# Altium PCB fmu-io.PcbDoc
Units mm, origin at the board's own origin, x right, y up, seen from the top; angles counter-clockwise.
Board outline 50 x 36 mm, 2 copper layers (Top Layer, Bottom Layer); 24 components, 24 nets, 120 pads, 161 vias.
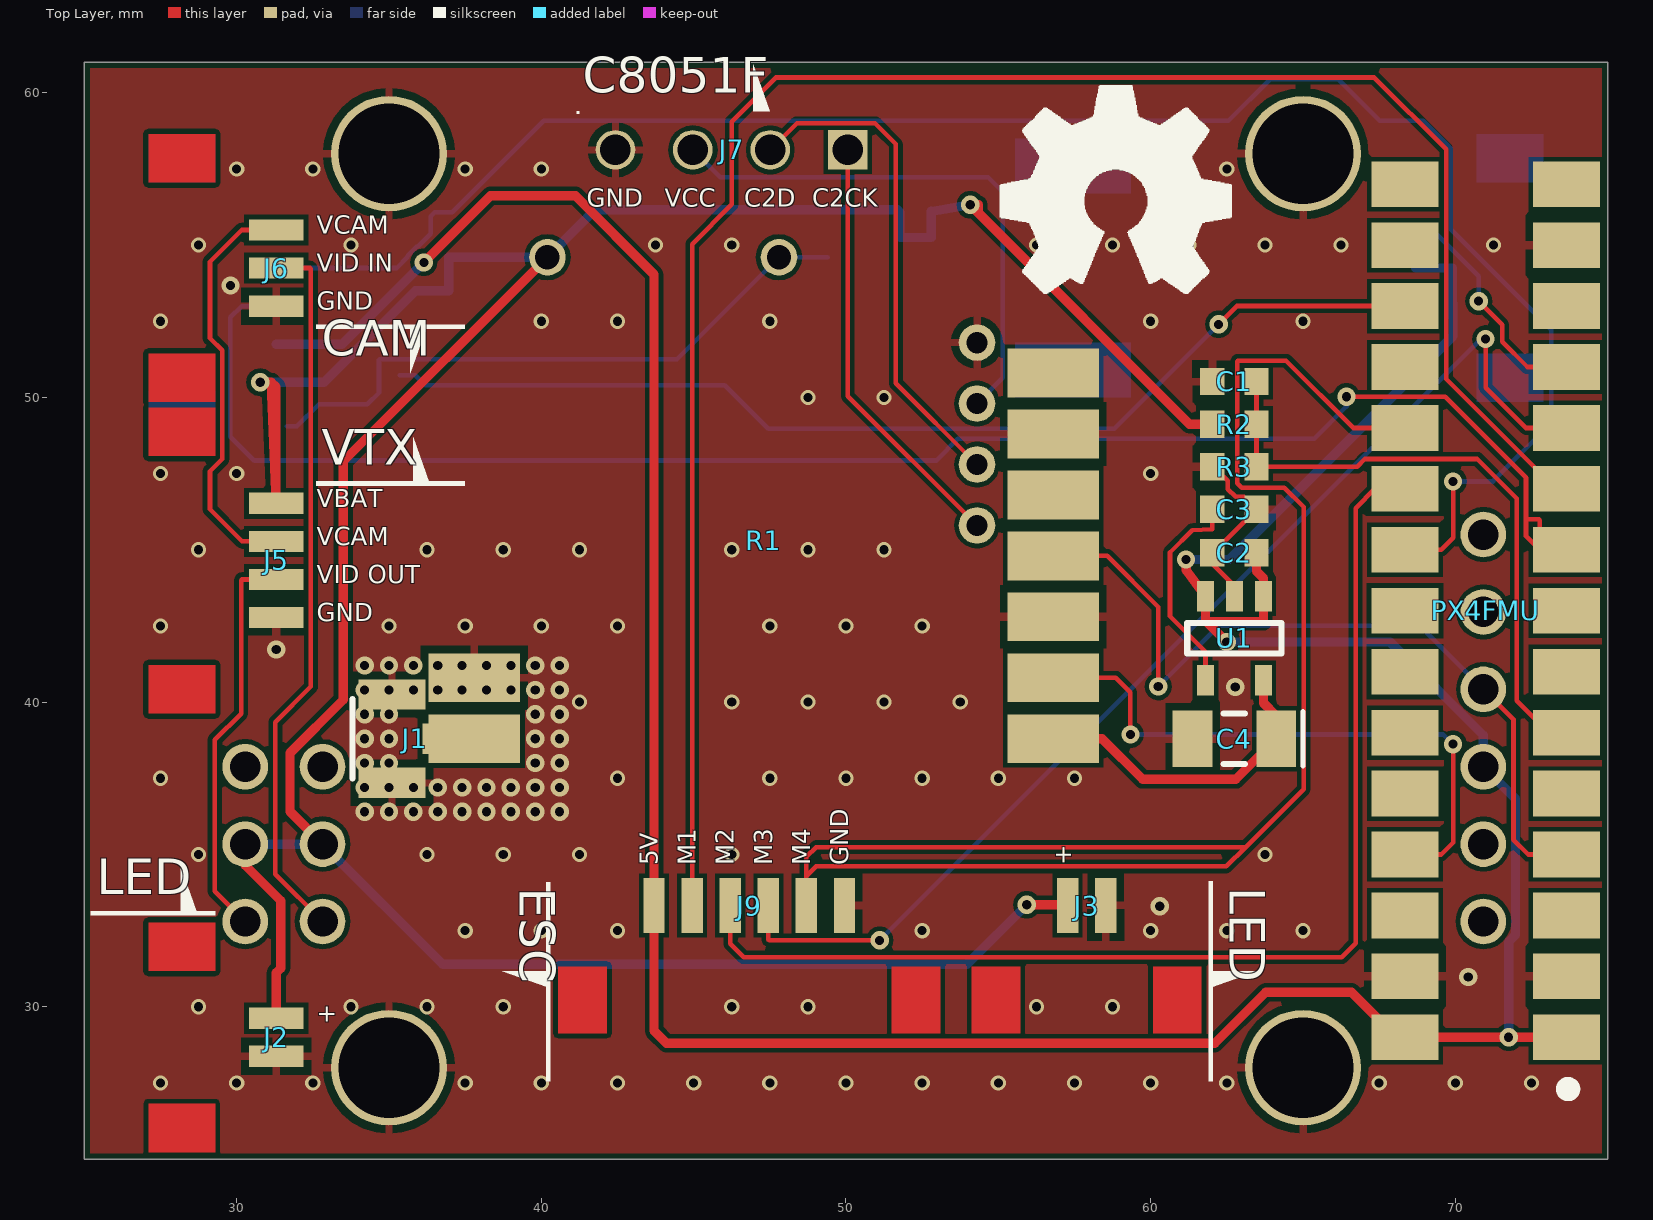
[diagram p0: Top Layer view]
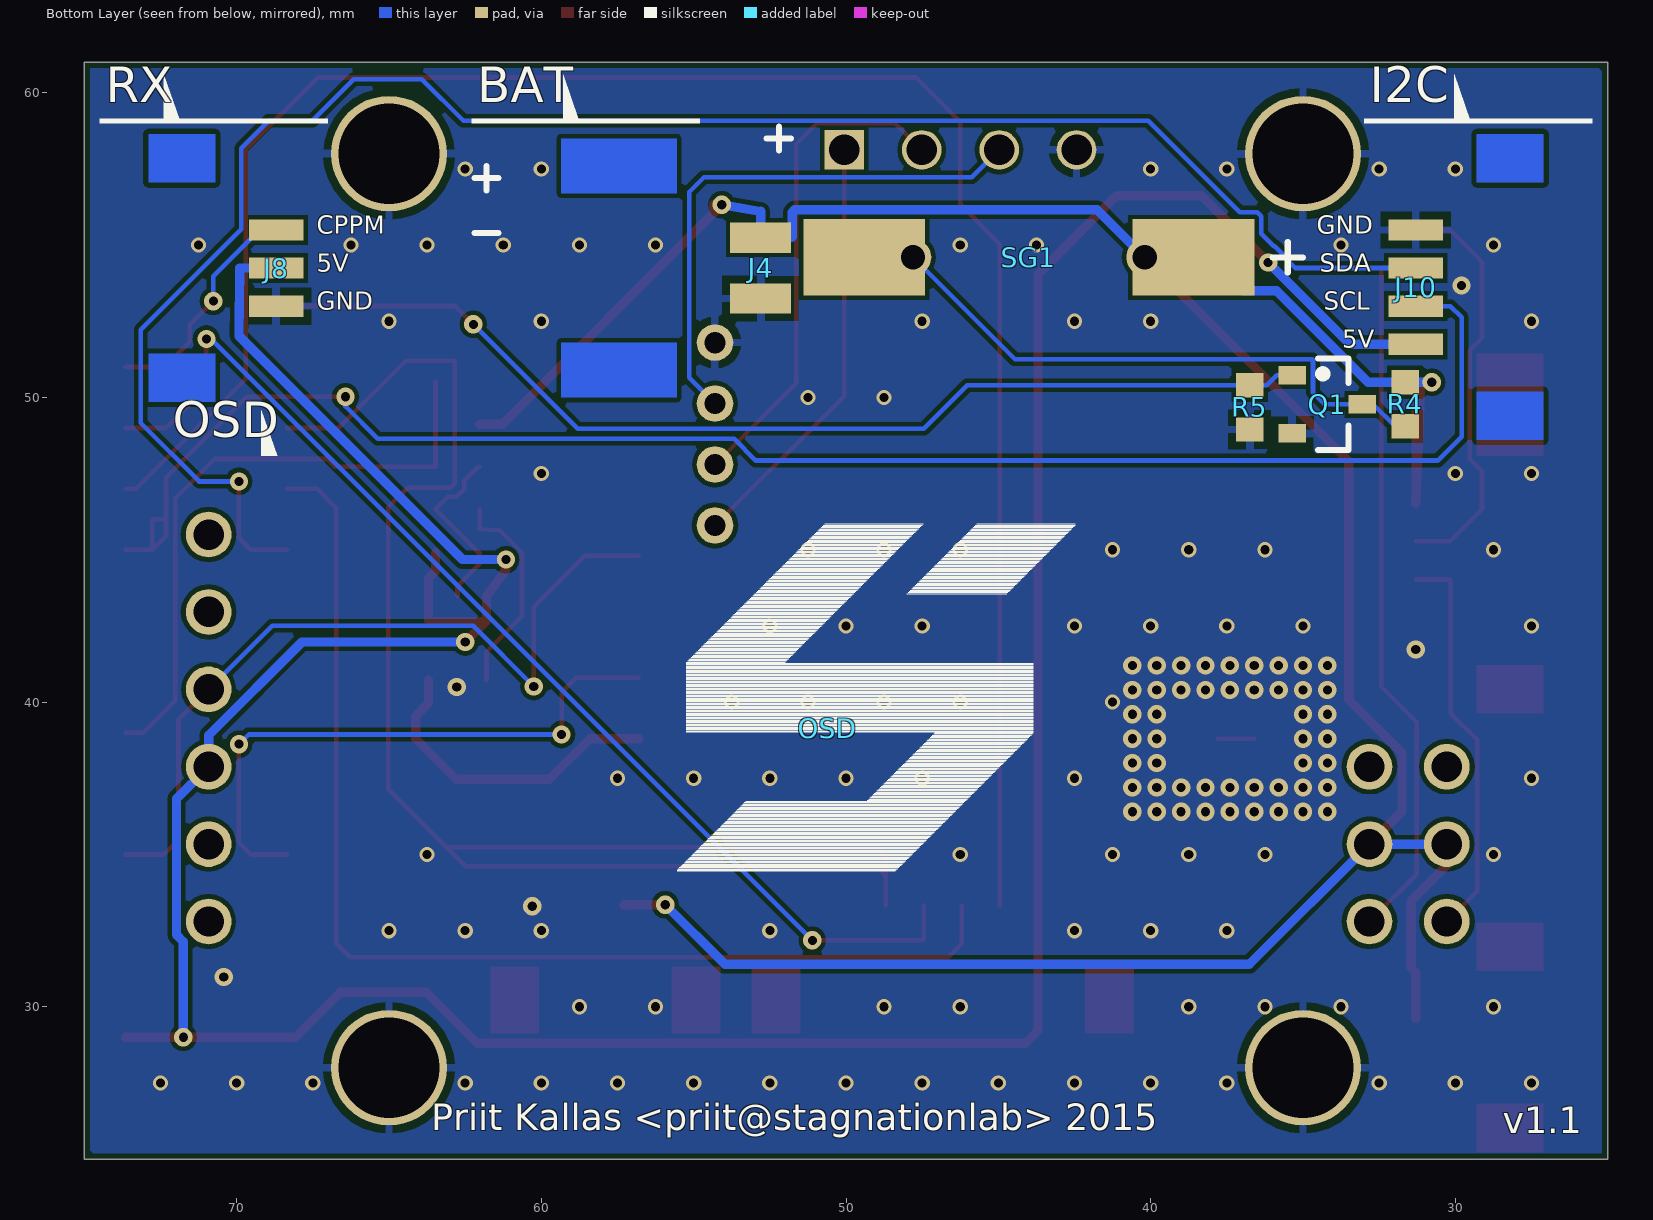
[diagram p1: Bottom Layer view, seen from below]
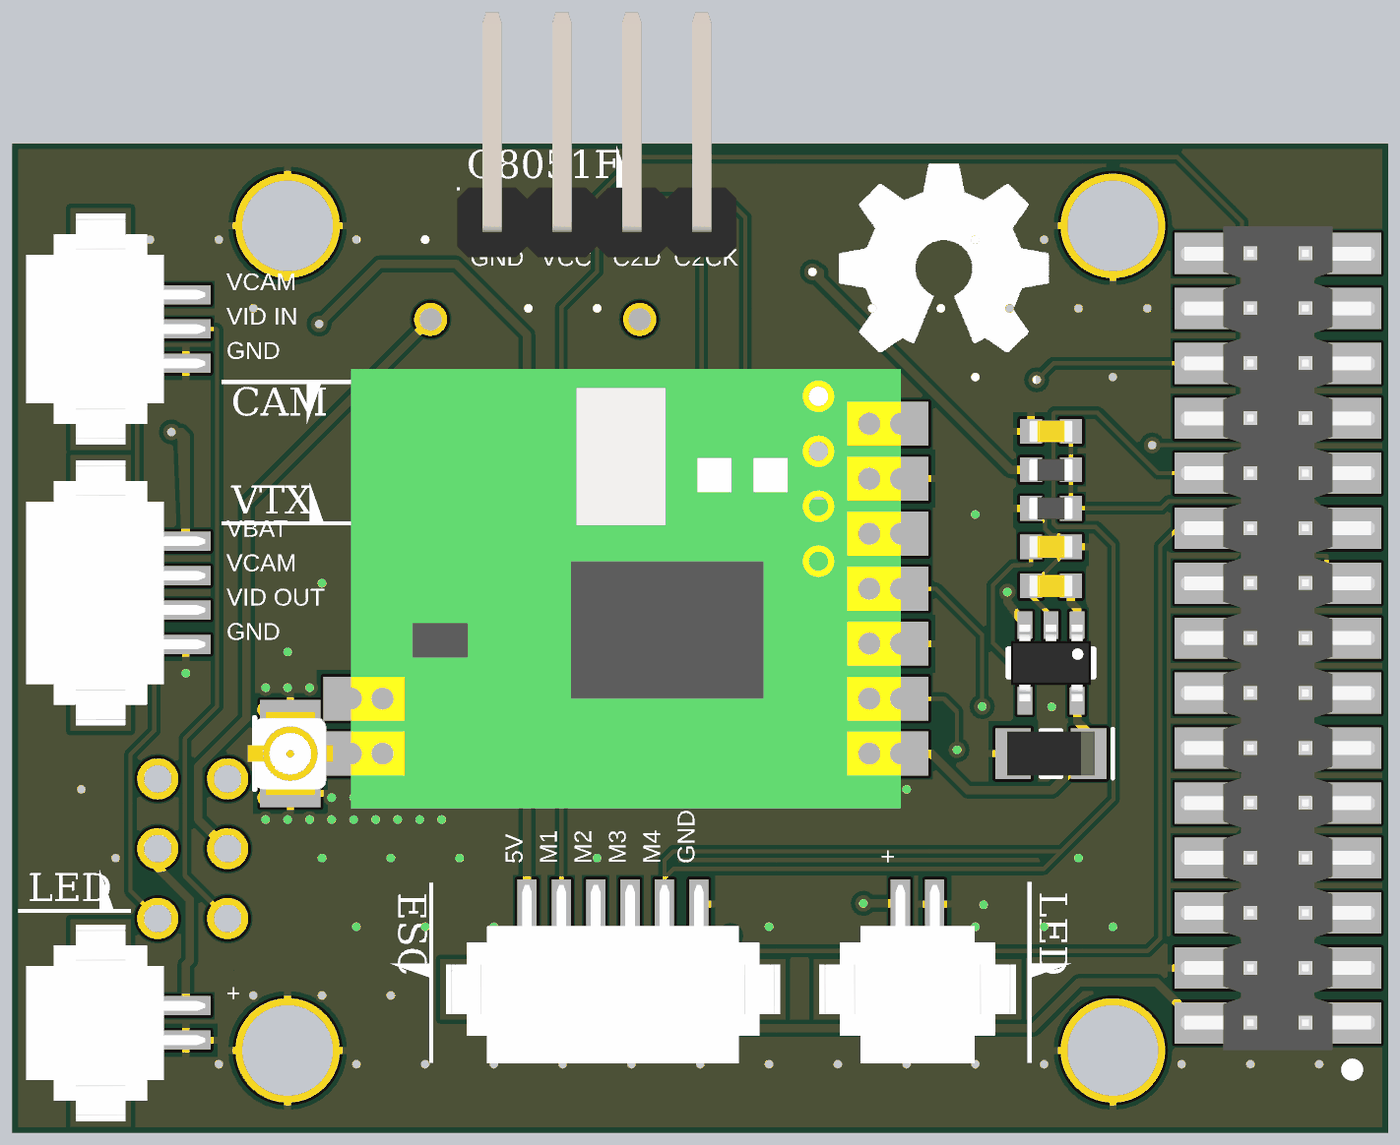
[diagram p2: 3D render of the assembled board from above, using the file's embedded part models]
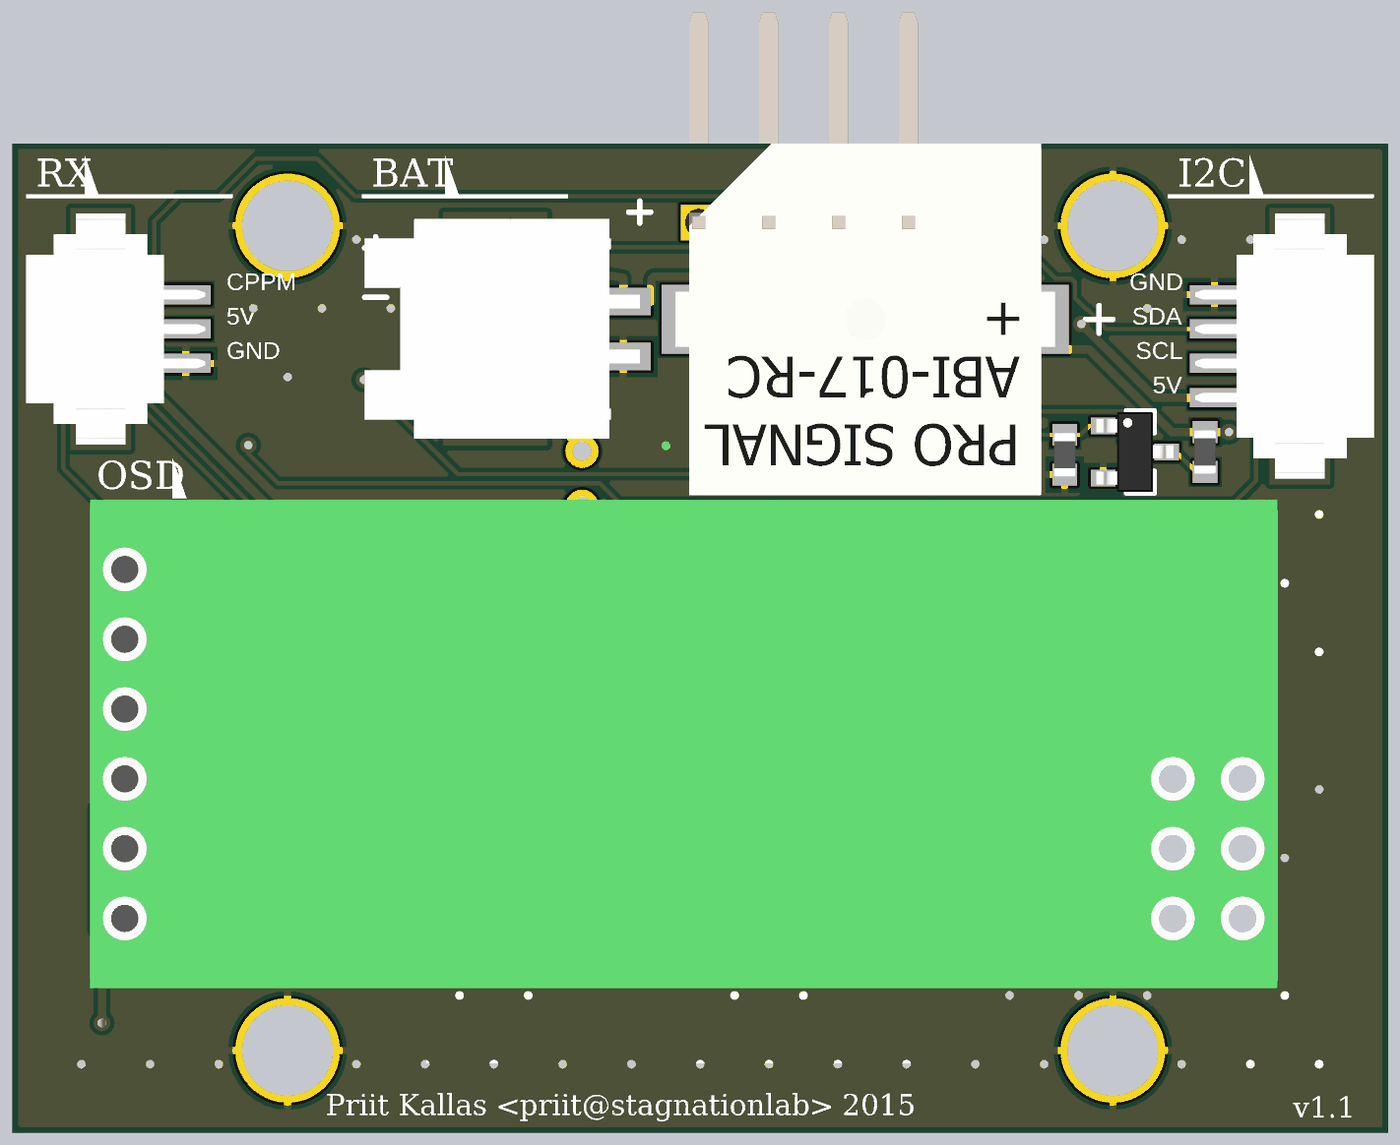
[diagram p3: 3D render of the assembled board from below, using the file's embedded part models]

## Layer stack, top to bottom
Top Solder: solder mask 0.0102, Solder Resist, Dk 3.5
Top Layer: signal copper 0.0356
Dielectric 1: dielectric 0.32, FR-4, Dk 4.8
Bottom Layer: signal copper 0.0356
Bottom Solder: solder mask 0.0102, Solder Resist, Dk 3.5

## Board outline
25,25 75,25 75,61 25,61

## Design rules (kind name [scope] priority, off if disabled: settings)
Clearance [All] p1: gap=0.152
DiffPairsRouting [All] p1: maxlimit=0.254 minlimit=0.254 mostfreqgap=0.254 toplayer_minwidth=0.152 toplayer_maxwidth=0.381 toplayer_prefwidth=0.152 bottomlayer_minwidth=0.152 bottomlayer_maxwidth=0.381 bottomlayer_prefwidth=0.152 maxuncoupledlength=12.7
HoleSize [All] p1: absolutevalues=TRUE maxlimit=6.35 minlimit=0.3 maxpercent=80.000 minpercent=20.000
MinimumSolderMaskSliver [All] p1: minsoldermaskwidth=0.1
PlaneClearance [All] p1: clearance=0.25
PlaneConnect [All] p1: planeconnectstyle=Relief reliefexpansion=0.5 reliefentries=4 reliefconductorwidth=0.254 reliefairgap=0.254
PolygonConnect PolygonConnect-GND-VIA [InNet('GND') AND IsVia] p1: connectstyle=Direct reliefconductorwidth=0.254 reliefentries=4 polygonreliefangle="90 Angle" airgapwidth=0.254
PolygonConnect [All] p2: connectstyle=Relief reliefconductorwidth=0.254 reliefentries=4 polygonreliefangle="90 Angle" airgapwidth=0.254
RoutingVias [All] p1: holewidth=0.3 width=0.6 viastyle="Through Hole" minholewidth=0.3 minwidth=0.6 maxholewidth=6.35 maxwidth=8
SilkToSilkClearance [All] p1: silktosilkclearance=0
SilkToSolderMaskClearance [IsPad] p1: minsilkscreentomaskgap=0.05 clearancetoexposedcopper=TRUE
SolderMaskExpansion [All] p1: expansion=0.102
UnpouredPolygon [All] p1: allowunpoured=FALSE
Width Width-VBAT [InNet('VBAT')] p1: maxlimit=0.305 minlimit=0.305 preferedwidth=0.305
Width Width-5V [InNet('5V')] p2: maxlimit=0.305 minlimit=0.305 preferedwidth=0.305
Width Width-3V3 [InNet('3V3')] p3: maxlimit=0.305 minlimit=0.305 preferedwidth=0.305
Width [All] p4: maxlimit=4 minlimit=0.152 preferedwidth=0.152
22 further rules are at their usual default settings.

## Components (designator, comment, footprint, x,y, rotation, side; value= is the part's Value field where it differs from the comment)
C1 "CAPACITOR" CAP-0603-GEN 62.75,50.525 r0 top
C2 "CAPACITOR" CAP-0603-GEN 62.75,44.9 r0 top
C3 "CAPACITOR" CAP-0603-GEN 62.75,46.325 r180 top
C4 "CAPACITOR-POLARIZED" CAP-1206-POL 62.749,38.8 r180 top
J1 "Antenna connector" ANTENNA-CONNECTOR 35.1,38.8 r90 top
J2 "Connector 2x1" DF13-2H-SMD 30.5,29 r90 top
J3 "Connector 2x1" DF13-2H-SMD 57.9,32.525 r180 top
J4 "Connector 2x1" JST-PA-2H-SMD 53.3,54.248 r90 bottom
J5 "Connector 1x4" DF13-4H-SMD 30.5,44.65 r90 top
J6 "Connector 1x3" DF13-3H-SMD 30.5,54.248 r90 top
J7 "Pinheader 1x4" PINHEADER-1x4-right-angle 50.053,58.125 r180 top
J8 "Connector 1x3" DF13-3H-SMD 69.5,54.248 r90 bottom
J9 "Connector 1x6" DF13-6H-SMD 46.825,32.525 r180 top
J10 "Connector 1x4" DF13-4H-SMD 30.502,53.623 r270 bottom
OSD "OSD" MINIMOSD 50.6,39.15 r180 bottom locked
PX4FMU "PX4FMU" HEADER-2x15-SMD 71,43 r90 top locked
Q1 "Mosfet N" SOT23-3 34.2,49.775 r180 bottom
R1 "UART radio" HM-TRP 47.3,44.8 r90 top locked
R2 "RESISTOR" RESISTOR-0603 62.75,49.125 r0 top
R3 "RESISTOR" RESISTOR-0603 62.75,47.725 r0 top
R4 "RESISTOR" RESISTOR-0603 31.65,49.775 r90 bottom
R5 "RESISTOR" RESISTOR-0603 36.75,49.675 r90 bottom
SG1 "Buzzer" BUZZER-ABI-017-RC 44,54.6 r90 bottom locked
U1 "Reg" SOT23-5 62.75,42.1 r270 top

## Footprints (in the part's own frame and the unit in brackets; to place one, negate y for a bottom-side part, rotate by r counter-clockwise, add the part's x,y. Pads: shape width x height; smd on the part's side, far side on the other; paste and mask are expansions set on the pad)
ANTENNA-CONNECTOR [mm] "PCB UFL antenna connector"
  rect 1x1 smd: 1(0,-1.5)
  rect 1x2.2 smd: 2(-1.45,0) 2(1.45,0)
  silkscreen extent -1.3,1.3 1.3,1.3, body extent -1.5,-1.55 1.5,1.55, height 1.25
BUZZER-ABI-017-RC [mm] "ABI-017-RC Buzzer"
  rect 2.5x4 smd: 1(0,-5.4) 2(0,5.4)
  round 1.2 hole 0.8: 1(0,-3.8) 2(0,3.8)
  silkscreen extent -0.5,-9 0.5,-8, body extent -6.4,-6.9 6.4,6.9, height 7.1
CAP-0603-GEN [mm] "Non-polarized 0603 (1608) chip capacitor"
  rect 0.8x0.9 smd: 1(-0.725,0) 2(0.725,0)
  body extent -0.8,-0.4 0.8,0.4, height 0.86
CAP-1206-POL [mm] "1206 (3216) polarized chip capacitor"
  rect 1.3x1.85 smd: 1(-1.375,0) 2(1.375,0)
  silkscreen extent -2.25,-0.9 0.35,0.9, body extent -1.6,-0.8 1.6,0.8, height 1.6
DF13-2H-SMD [mm] "Hirose DF13 horizontal SMD 2 pin connector"
  rect 0.7x1.8 smd: 1(0.625,-0.8) 2(-0.625,-0.8)
  Top Layer region: -3.775,1.2 -2.175,1.2 -2.175,3.4 -3.775,3.4
  Top Layer region: 3.775,3.4 2.175,3.4 2.175,1.2 3.775,1.2
  body extent -3.58,-1.5 3.58,5, height 3.6
DF13-3H-SMD [mm] "Hirose DF13 horizontal SMD 3 pin connector"
  rect 0.7x1.8 smd: 1(1.25,-0.8) 2(0,-0.8) 3(-1.25,-0.8)
  Top Layer region: 4.4,3.4 2.8,3.4 2.8,1.2 4.4,1.2
  Top Layer region: -4.4,1.2 -2.8,1.2 -2.8,3.4 -4.4,3.4
  body extent -4.2,-1.5 4.2,5, height 3.6
DF13-4H-SMD [mm] "Hirose DF13 horizontal SMD 4 pin connector"
  rect 0.7x1.8 smd: 1(1.875,-0.8) 2(0.625,-0.8) 3(-0.625,-0.8) 4(-1.875,-0.8)
  Top Layer region: -5.025,1.2 -3.425,1.2 -3.425,3.4 -5.025,3.4
  Top Layer region: 5.025,3.4 3.425,3.4 3.425,1.2 5.025,1.2
  body extent -4.83,-1.5 4.83,5, height 3.6
DF13-6H-SMD [mm] "Hirose DF13 horizontal SMD 6 pin connector"
  rect 0.7x1.8 smd: 1(3.125,-0.8) 2(1.875,-0.8) 3(0.625,-0.8) 4(-0.625,-0.8) 5(-1.875,-0.8) 6(-3.125,-0.8)
  Top Layer region: -6.275,1.2 -4.675,1.2 -4.675,3.4 -6.275,3.4
  Top Layer region: 6.275,3.4 4.675,3.4 4.675,1.2 6.275,1.2
  body extent -6.08,-1.5 6.08,5, height 3.6
HEADER-2x15-SMD [mm] "SMD 2mm pitch 2 row 30 contacts"
  rect 1.5x2.2 smd: 1(-14,-2.65) 2(-14,2.65) 3(-12,-2.65) 4(-12,2.65) 5(-10,-2.65) 6(-10,2.65) 7(-8,-2.65) 8(-8,2.65) 9(-6,-2.65) 10(-6,2.65) 11(-4,-2.65) 12(-4,2.65) 13(-2,-2.65) 14(-2,2.65) 15(0,-2.65) 16(0,2.65) 17(2,-2.65) 18(2,2.65) 19(4,-2.65) 20(4,2.65) 21(6,-2.65) 22(6,2.65) 23(8,-2.65) 24(8,2.65) 25(10,-2.65) 26(10,2.65) 27(12,-2.65) 28(12,2.65) 29(14,-2.65) 30(14,2.65)
  silkscreen extent -15.9,-2.9 -15.5,-2.5, body extent -14.99,-3.52 14.99,3.52, height 5.7
HM-TRP [mm]
  rect 1.6x3 smd: 1(-6,-9.5) 2(-4,-9.5) 3(-2,-9.5) 4(0,-9.5) 5(2,-9.5) 6(4,-9.5) 7(6,-9.5) 8(-4,9.5) 9(-6,9.5)
  round 1.2 hole 0.7: 10(1,-7) 11(3,-7) 12(5,-7) 13(7,-7)
  body extent -8,-10 8,10, height 2
JST-PA-2H-SMD [mm] "JS PA 2 pin horizontal SMD connector"
  rect 1x2 smd: 1(1,-0.5) 2(-1,-0.5)
  Top Layer region: -4.25,6.05 -2.45,6.05 -2.45,2.25 -4.25,2.25
  Top Layer region: 4.25,2.25 2.45,2.25 2.45,6.05 4.25,6.05
  body extent -4,-1.1 4,8.9, height 5.8
MINIMOSD [mm] "MinimOSD module"
  round 1.5 hole 1: 1(-20.32,6.35) 2(-20.32,3.81) 3(-20.32,1.27) 4(-20.32,-1.27) 5(-20.32,-3.81) 6(-20.32,-6.35) 7(20.32,-6.35) 8(17.78,-6.35) 9(20.32,-3.81) 10(17.78,-3.81) 11(20.32,-1.27) 12(17.78,-1.27)
  body extent -21.59,-8.89 21.59,8.89, height 1.6
PINHEADER-1x4-right-angle [mm] "Single row four pin header"
  rect 1.3x1.3 hole 1: 1(0,0)
  round 1.3 hole 1: 2(2.54,0) 3(5.08,0) 4(7.62,0)
  body extent -1.27,-7.65 8.89,1.27, height 4.14
RESISTOR-0603 [mm] "Chip resistor 0603 (1608)"
  rect 0.8x0.9 smd: 1(-0.725,0) 2(0.725,0)
  body extent -0.8,-0.4 0.8,0.4, height 0.5
SOT23-3 [mm] "SOT23 3-leads mosfet"
  rect 0.9x0.6 smd: 1(-1.15,0.95) 2(-1.15,-0.95) 3(1.15,0)
  silkscreen extent -0.3,-1.5 0.7,1.5, body extent -1.4,-1.45 1.4,1.45, height 1.3
SOT23-5 [mm] "SOT23 5-Leads"
  rect 1x0.55 smd: 1(-1.375,0.95) 2(-1.375,0) 3(-1.375,-0.95) 4(1.375,-0.95) 5(1.375,0.95)
  silkscreen extent -0.5,-1.55 0.5,1.55, body extent -1.4,-1.45 1.4,1.45, height 1.45

## Part data
C1 C2 C3: "Capacitor"
C4: "Polarized capacitor"
J1: library part ANTENNA-CONNECTOR
J2 J3 J4: library part CONNECTOR-1x2, "Single row two contact connector"
J5 J10: library part CONNECTOR-1x4, "Single row 4 contact connector"
J6 J8: library part CONNECTOR-1x3, "Single row 3 contact connector"
J7: library part PINHEADER-1x4, "Single row four pin header"
J9: library part CONNECTOR-1x6, "Single row 6 contact connector"
OSD: library part MINIMOSD, "On-screen display"
PX4FMU: "PX4FMU flight controller"
Q1: library part MOSFET-N, "N-channel mosfet"
R1: library part HM-TRP, "UART long range radio"
R2 R3 R4 R5: "Resistor"
SG1: library part BUZZER
U1: library part SOT23-REG, "Voltage regulator"

## Free pads (board coordinates)
  round 3.8 hole 3.3: ""(35,28) ""(35,58) ""(65,28) ""(65,58)

## Via types
v1: diameter 0.5, hole 0.3, Top Layer to Bottom Layer, tented both sides, 92 vias
v2: diameter 0.6, hole 0.3, Top Layer to Bottom Layer, tented both sides, 69 vias

## Nets (pads, with @x,y where several pads share a name; then routed paths per layer and width w, separated by ;. In a path a pad name is that pad's centre, name@x,y a point inside that pad or via, vN(x,y) a via of type N, cw(c..) or ccw(c..) an arc to the next point about the centre after c; other vN are vias at no path point)
3V3: C4.1 R1.1 U1.5 | length 10.5
  Top Layer w0.305: R1.1 58.406,38.8 59.741,37.465 62.789,37.465 C4.1 64.124,39.548 63.7,39.972 U1.5
5V: C2.2 J8.2 J9.1 J10.1 OSD.4 PX4FMU.1 PX4FMU.2 U1.1 U1.3 | length 114.5
  Top Layer w0.305: v2(36.144,54.432) 38.329,56.617 41.123,56.617 43.7,54.039 J9.1 43.7,29.21 44.106,28.804 62.103,28.804 63.774,30.475 66.594,30.475 68.069,29 PX4FMU.2 PX4FMU.1 ; v2(61.163,44.679) 61.163,44.328 U1.3 61.8,42.672 61.825,42.647 ; v2(62.497,41.975) 61.825,42.647 ; C2.2 63.475,44.294 63.7,44.069 U1.1 63.7,42.672 63.675,42.647 61.825,42.647
  Bottom Layer w0.305: J10.1 33.46,51.748 v2(36.144,54.432) ; v2(61.163,44.679) 62.586,44.679 69.926,52.019 69.901,54.248 J8.2 ; v2(62.497,41.975) 67.855,41.975 70.92,38.91 OSD.4 71.975,36.825 71.975,32.363 71.75,32.138 v2(71.75,29)
BAT_V_SENSE: C1.2 PX4FMU.11 R2.2 R3.2 | length 20.7
  Top Layer w0.152: C1.2 R2.2 R3.2 66.775,47.725 67.031,47.981 70.721,47.981 72.017,46.685 72.017,40.048 73.065,39 PX4FMU.11
BUZZER_SIGNAL: PX4FMU.26 Q1.1 R5.2 | length 35.4
  Top Layer w0.152: v2(62.23,52.4) 62.83,53 PX4FMU.26
  Bottom Layer w0.152: Q1.1 35.865,50.725 36.19,50.4 R5.2 46.018,50.4 47.447,48.971 58.801,48.971 v2(62.23,52.4)
GND: C1.1 C2.1 C3.1 C4.2 J1.2 J2.2 J3.2 J4.2 J5.4 J6.3 J7.4 J8.3 J9.6 J10.4 pad. PX4FMU.3 PX4FMU.4 PX4FMU.27 Q1.2 R1.3 R1.6 R1.8 R1.13 R3.1 R5.1 U1.2 | length 6
  Top Layer w0.152: R3.1 62.075,47.725 62.535,47.265 62.535,46.989 62.787,46.736 63.064,46.736 C3.1 62.05,44.9 C2.1 62.025,44.54 62.75,43.815 U1.2
  other v1: 27.5,27.5 30,27.5 32.5,27.5 37.5,27.5 40,27.5 42.5,27.5 45,27.5 47.5,27.5 50,27.5 52.5,27.5 55,27.5 57.5,27.5 60,27.5 62.5,27.5 67.5,27.5 70,27.5 72.5,27.5 28.75,30 33.75,30 36.25,30 38.75,30 46.25,30 48.75,30 56.25,30 58.75,30 37.5,32.5 40,32.5 42.5,32.5 52.5,32.5 60,32.5 62.5,32.5 65,32.5 28.75,35 36.25,35 38.75,35 41.25,35 46.25,35 63.75,35 27.5,37.5 42.5,37.5 47.5,37.5 50,37.5 52.5,37.5 55,37.5 57.5,37.5 41.25,40 46.25,40 48.75,40 51.25,40 53.75,40 27.5,42.5 35,42.5 37.5,42.5 40,42.5 42.5,42.5 47.5,42.5 50,42.5 52.5,42.5 28.75,45 36.25,45 38.75,45 41.25,45 46.25,45 48.75,45 51.25,45 27.5,47.5 30,47.5 60,47.5 48.75,50 51.25,50 27.5,52.5 40,52.5 42.5,52.5 47.5,52.5 60,52.5 65,52.5 28.75,55 33.75,55 43.75,55 46.25,55 56.25,55 58.75,55 61.25,55 63.75,55 66.25,55 71.25,55 30,57.5 32.5,57.5 37.5,57.5 40,57.5 60,57.5 62.5,57.5
  other v2: 70.425,30.975 60.3,33.3 34.2,36.4 35,36.4 35.8,36.4 36.6,36.4 37.4,36.4 38.2,36.4 39,36.4 39.8,36.4 40.6,36.4 34.2,37.2 35,37.2 35.8,37.2 36.6,37.2 37.4,37.2 38.2,37.2 39,37.2 39.8,37.2 40.6,37.2 34.2,38 35,38 39.8,38 40.6,38 34.2,38.8 35,38.8 39.8,38.8 40.6,38.8 34.2,39.6 35,39.6 39.8,39.6 40.6,39.6 34.2,40.4 35,40.4 35.8,40.4 36.6,40.4 37.4,40.4 38.2,40.4 39,40.4 39.8,40.4 40.6,40.4 62.775,40.5 34.2,41.2 35,41.2 35.8,41.2 36.6,41.2 37.4,41.2 38.2,41.2 39,41.2 39.8,41.2 40.6,41.2 31.3,41.725 29.8,53.675
I2C_SCL: J10.2 PX4FMU.17 | length 55.5
  Top Layer w0.152: v2(66.429,50.021) 66.745,50.021 69.664,50.021 72.321,47.363 72.321,46.025 ; PX4FMU.17 PX4FMU.17@72.771,45 ; 72.321,46.025 72.347,45.999 72.746,45.999 72.771,45.974 PX4FMU.17@72.771,45 ; 72.321,46.025 72.321,45.449 PX4FMU.17@72.771,45
  Bottom Layer w0.152: J10.2 30.162,52.998 29.794,52.63 29.794,48.717 30.582,47.93 52.959,47.93 53.67,48.641 65.364,48.641 66.429,49.705 v2(66.429,50.021)
I2C_SDA: J10.3 PX4FMU.18 | length 60.4
  Top Layer w0.152: PX4FMU.18 69.532,45 69.926,45.394 v2(69.926,47.244)
  Bottom Layer w0.152: J10.3 35.248,54.248 35.616,54.616 35.616,54.651 35.925,54.961 35.961,54.961 36.371,55.371 36.371,55.945 36.505,56.079 37.079,56.079 40.08,59.08 62.555,59.08 63.925,60.45 66.15,60.45 67.52,59.08 68.948,59.08 69.85,58.179 69.85,55.524 73.152,52.222 73.152,49.162 71.234,47.244 v2(69.926,47.244)
MOTOR_1: J9.2 PX4FMU.19 | length 64.3
  Top Layer w0.152: J9.2 44.95,55.034 46.253,56.337 46.253,59.055 47.698,60.5 67.338,60.5 69.698,58.141 69.698,50.607 73.304,47 PX4FMU.19
MOTOR_2: J9.3 PX4FMU.20 | length 38.3
  Top Layer w0.152: J9.3 46.2,32.067 46.645,31.623 66.269,31.623 66.726,32.08 66.726,46.365 67.361,47 PX4FMU.20
MOTOR_3: J9.4 PX4FMU.21 | length 37.6
  Top Layer w0.152: J9.4 47.45,32.207 47.475,32.182 v2(51.105,32.182) ; v2(70.993,51.918) 70.993,50.321 72.314,49 PX4FMU.21
  Bottom Layer w0.152: v2(51.105,32.182) 70.841,51.918 v2(70.993,51.918)
MOTOR_4: J9.5 PX4FMU.22 | length 55.9
  Top Layer w0.152: J9.5 48.7,34.29 ; PX4FMU.22 66.65,49 64.443,51.206 62.865,51.206 62.84,51.181 62.84,47.187 62.986,47.041 64.389,47.041 65.024,46.406 65.024,37.148 63.119,35.242 ; 48.7,34.29 49.017,34.608 62.484,34.608 63.119,35.242 ; 48.7,34.29 48.7,34.925 49.017,35.242 63.119,35.242
NetC3_2: C3.2 U1.4 | length 7
  Top Layer w0.152: U1.4 61.8,41.656 60.635,42.821 60.635,44.912 61.366,45.644 62.025,45.669 C3.2
NetQ1_3: Q1.3 R4.1 SG1.2 | length 20.7
  Bottom Layer w0.152: R4.1 31.979,49.05 32.704,49.775 Q1.3 34.29,49.775 34.671,50.156 34.671,51.228 34.696,51.254 44.454,51.254 47.8,54.6 SG1.2@49.4,54.6
RADIO_ANT: J1.1 R1.9 | length 1.2
  Top Layer w0.152: J1.1 R1.9
RADIO_C2CK: J7.1 R1.10 | length 14.1
  Top Layer w0.152: J7.1 50.053,50.047 R1.10
RADIO_C2D: J7.2 R1.11 | length 16.4
  Top Layer w0.152: J7.2 48.392,59.004 50.952,59.004 51.638,58.318 51.638,50.462 R1.11
RADIO_VCC: J7.3 R1.12 | length 18
  Bottom Layer w0.152: J7.3 45.872,57.226 54.661,57.226 55.143,56.744 55.143,50.643 R1.12
RECEIVER_PPM: J8.1 PX4FMU.23 | length 7.6
  Top Layer w0.152: v2(70.764,53.162) 71.539,52.387 71.539,51.829 72.368,51 PX4FMU.23
  Bottom Layer w0.152: J8.1 69.24,55.498 70.764,53.974 v2(70.764,53.162)
TELEMETRY_RX: PX4FMU.8 R1.2 | length 19.8
  Top Layer w0.152: R1.2 58.857,40.8 59.334,40.322 v2(59.334,38.938) ; PX4FMU.8 69.532,35 69.926,35.394 v2(69.926,38.621)
  Bottom Layer w0.152: v2(59.334,38.938) 69.609,38.938 v2(69.926,38.621)
TELEMETRY_TX: OSD.3 PX4FMU.7 R1.4 | length 26.4
  Top Layer w0.152: R1.4 58.572,44.8 60.249,43.124 v2(60.249,40.513) ; OSD.3 71.907,39.433 71.907,35.482 72.39,35 PX4FMU.7
  Bottom Layer w0.152: v2(60.249,40.513) 62.239,42.504 68.836,42.504 OSD.3
VBAT: J2.1 J3.1 J4.1 J5.1 OSD.9 OSD.10 R2.1 R4.2 SG1.1 | length 106.5
  Top Layer w0.305: OSD.9 30.28,34.646 31.445,33.48 31.445,31.267 31.3,31.122 J2.1 ; v2(30.775,50.5) 31.136,50.5 ; J5.1 J5.1@31.293,46.525 ; OSD.10 31.75,36.41 31.75,38.329 33.503,40.081 33.503,47.903 SG1.1@40.2,54.6 ; v2(54.078,56.325) 54.35,56.053 ; v2@54.35,56.325 54.35,56.053 ; v2(55.931,33.35) 57.275,33.35 J3.1 ; R2.1 61.277,49.125 54.35,56.053 ; 31.136,50.5 31.293,50.343 J5.1@31.293,46.525 ; 31.136,50.5 J5.1@31.293,46.525
  Bottom Layer w0.305: OSD.9 OSD.10 36.766,31.394 53.975,31.394 v2(55.931,33.35) ; v2(30.775,50.5) R4.2 32.864,50.5 35.867,53.502 36.964,53.502 36.964,54.6 38.6,54.6 40.2,54.6 41.759,56.159 51.689,56.159 51.765,56.083 51.765,55.274 51.791,55.248 J4.1 52.8,56.109 v2(54.078,56.325)
VCAM: J5.2 J6.1 | length 13.7
  Top Layer w0.152: J5.2 30.175,45.275 29.125,46.325 29.125,47.577 29.529,47.98 29.529,51.543 29.125,51.947 29.125,54.448 30.175,55.498 J6.1
VIDEO_IN: J6.2 OSD.8 | length 23.7
  Top Layer w0.152: J6.2 32.41,54.248 32.436,54.223 32.436,40.513 31.267,39.345 31.267,34.353 OSD.8
VIDEO_OUT: J5.3 OSD.7 | length 13.1
  Top Layer w0.152: OSD.7 29.286,33.794 29.286,38.76 30.15,39.624 30.15,44 30.175,44.025 J5.3
pads on no net: OSD.1 OSD.2 OSD.5 OSD.6 OSD.11 OSD.12 PX4FMU.5 PX4FMU.6 PX4FMU.9 PX4FMU.10 PX4FMU.12 PX4FMU.13 PX4FMU.14 PX4FMU.15 PX4FMU.16 PX4FMU.24 PX4FMU.25 PX4FMU.28 PX4FMU.29 PX4FMU.30 R1.5 R1.7

## Polygon pours and split planes (outlines as drawn)
GND on Top Layer "Top GND" (solid, pour order 4): 25.2,25.2 25.2,60.8 74.8,60.8 74.8,25.2 25.2,25.2
GND on Bottom Layer "Bottom GND" (solid, pour order 3): 25.2,25.2 74.8,25.2 74.8,60.8 25.2,60.8

## Silkscreen, mask and mechanical layers (free items; w line width, h text height)
Top Overlay:
  drawing of 503 lines, arcs and shapes, not listed
  text "C8051F" at 41.353,59.611 h2
  text "GND" at 41.487,56.065 h1
  text "VCC" at 44.05,56.065 h1
  text "C2D" at 46.665,56.065 h1
  text "C2CK" at 48.884,56.065 h1
  text "VCAM" at 32.625,55.179 h1
  text "VID IN" at 32.625,53.929 h1
  text "GND" at 32.624,52.679 h1
  text "CAM" at 32.8,50.975 h2
  text "VTX" at 32.8,47.4 h2
  text "VBAT" at 32.625,46.205 h1
  text "VCAM" at 32.625,44.955 h1
  text "VID OUT" at 32.625,43.705 h1
  text "GND" at 32.625,42.455 h1
  text "5V" at 44.02,34.65 h1 r90
  text "M1" at 45.27,34.65 h1 r90
  text "M2" at 46.52,34.65 h1 r90
  text "M3" at 47.77,34.65 h1 r90
  text "M4" at 49.02,34.65 h1 r90
  text "GND" at 50.27,34.65 h1 r90
  text "+" at 57.595,34.65 h1 r90
  text "LED" at 62.2,33.925 h2 r270
  text "ESC" at 38.9,33.9 h2 r270
  text "LED" at 25.4,33.3 h2
  text "+" at 32.625,29.305 h1
Bottom Overlay:
  drawing of 373 lines, arcs and shapes, not listed
  text "I2C" at 32.802,59.3 h2
  text "BAT" at 62.1,59.3 h2
  text "RX" at 74.3,59.3 h2
  text "GND" at 34.549,55.179 h1
  text "CPPM" at 67.375,55.179 h1
  text "SDA" at 34.455,53.929 h1
  text "5V" at 67.375,53.929 h1
  text "SCL" at 34.324,52.679 h1
  text "GND" at 67.375,52.679 h1
  text "5V" at 33.707,51.429 h1
  text "OSD" at 72.1,48.3 h2
  text "Priit Kallas <priit@stagnationlab> 2015" at 63.615,25.65 h1.5
  text "v1.1" at 28.45,25.56 h1.5
Mechanical 1:
  the board outline again, w0.2